# Allegro board BLDC_MOTOR_CONTROLLER.brd
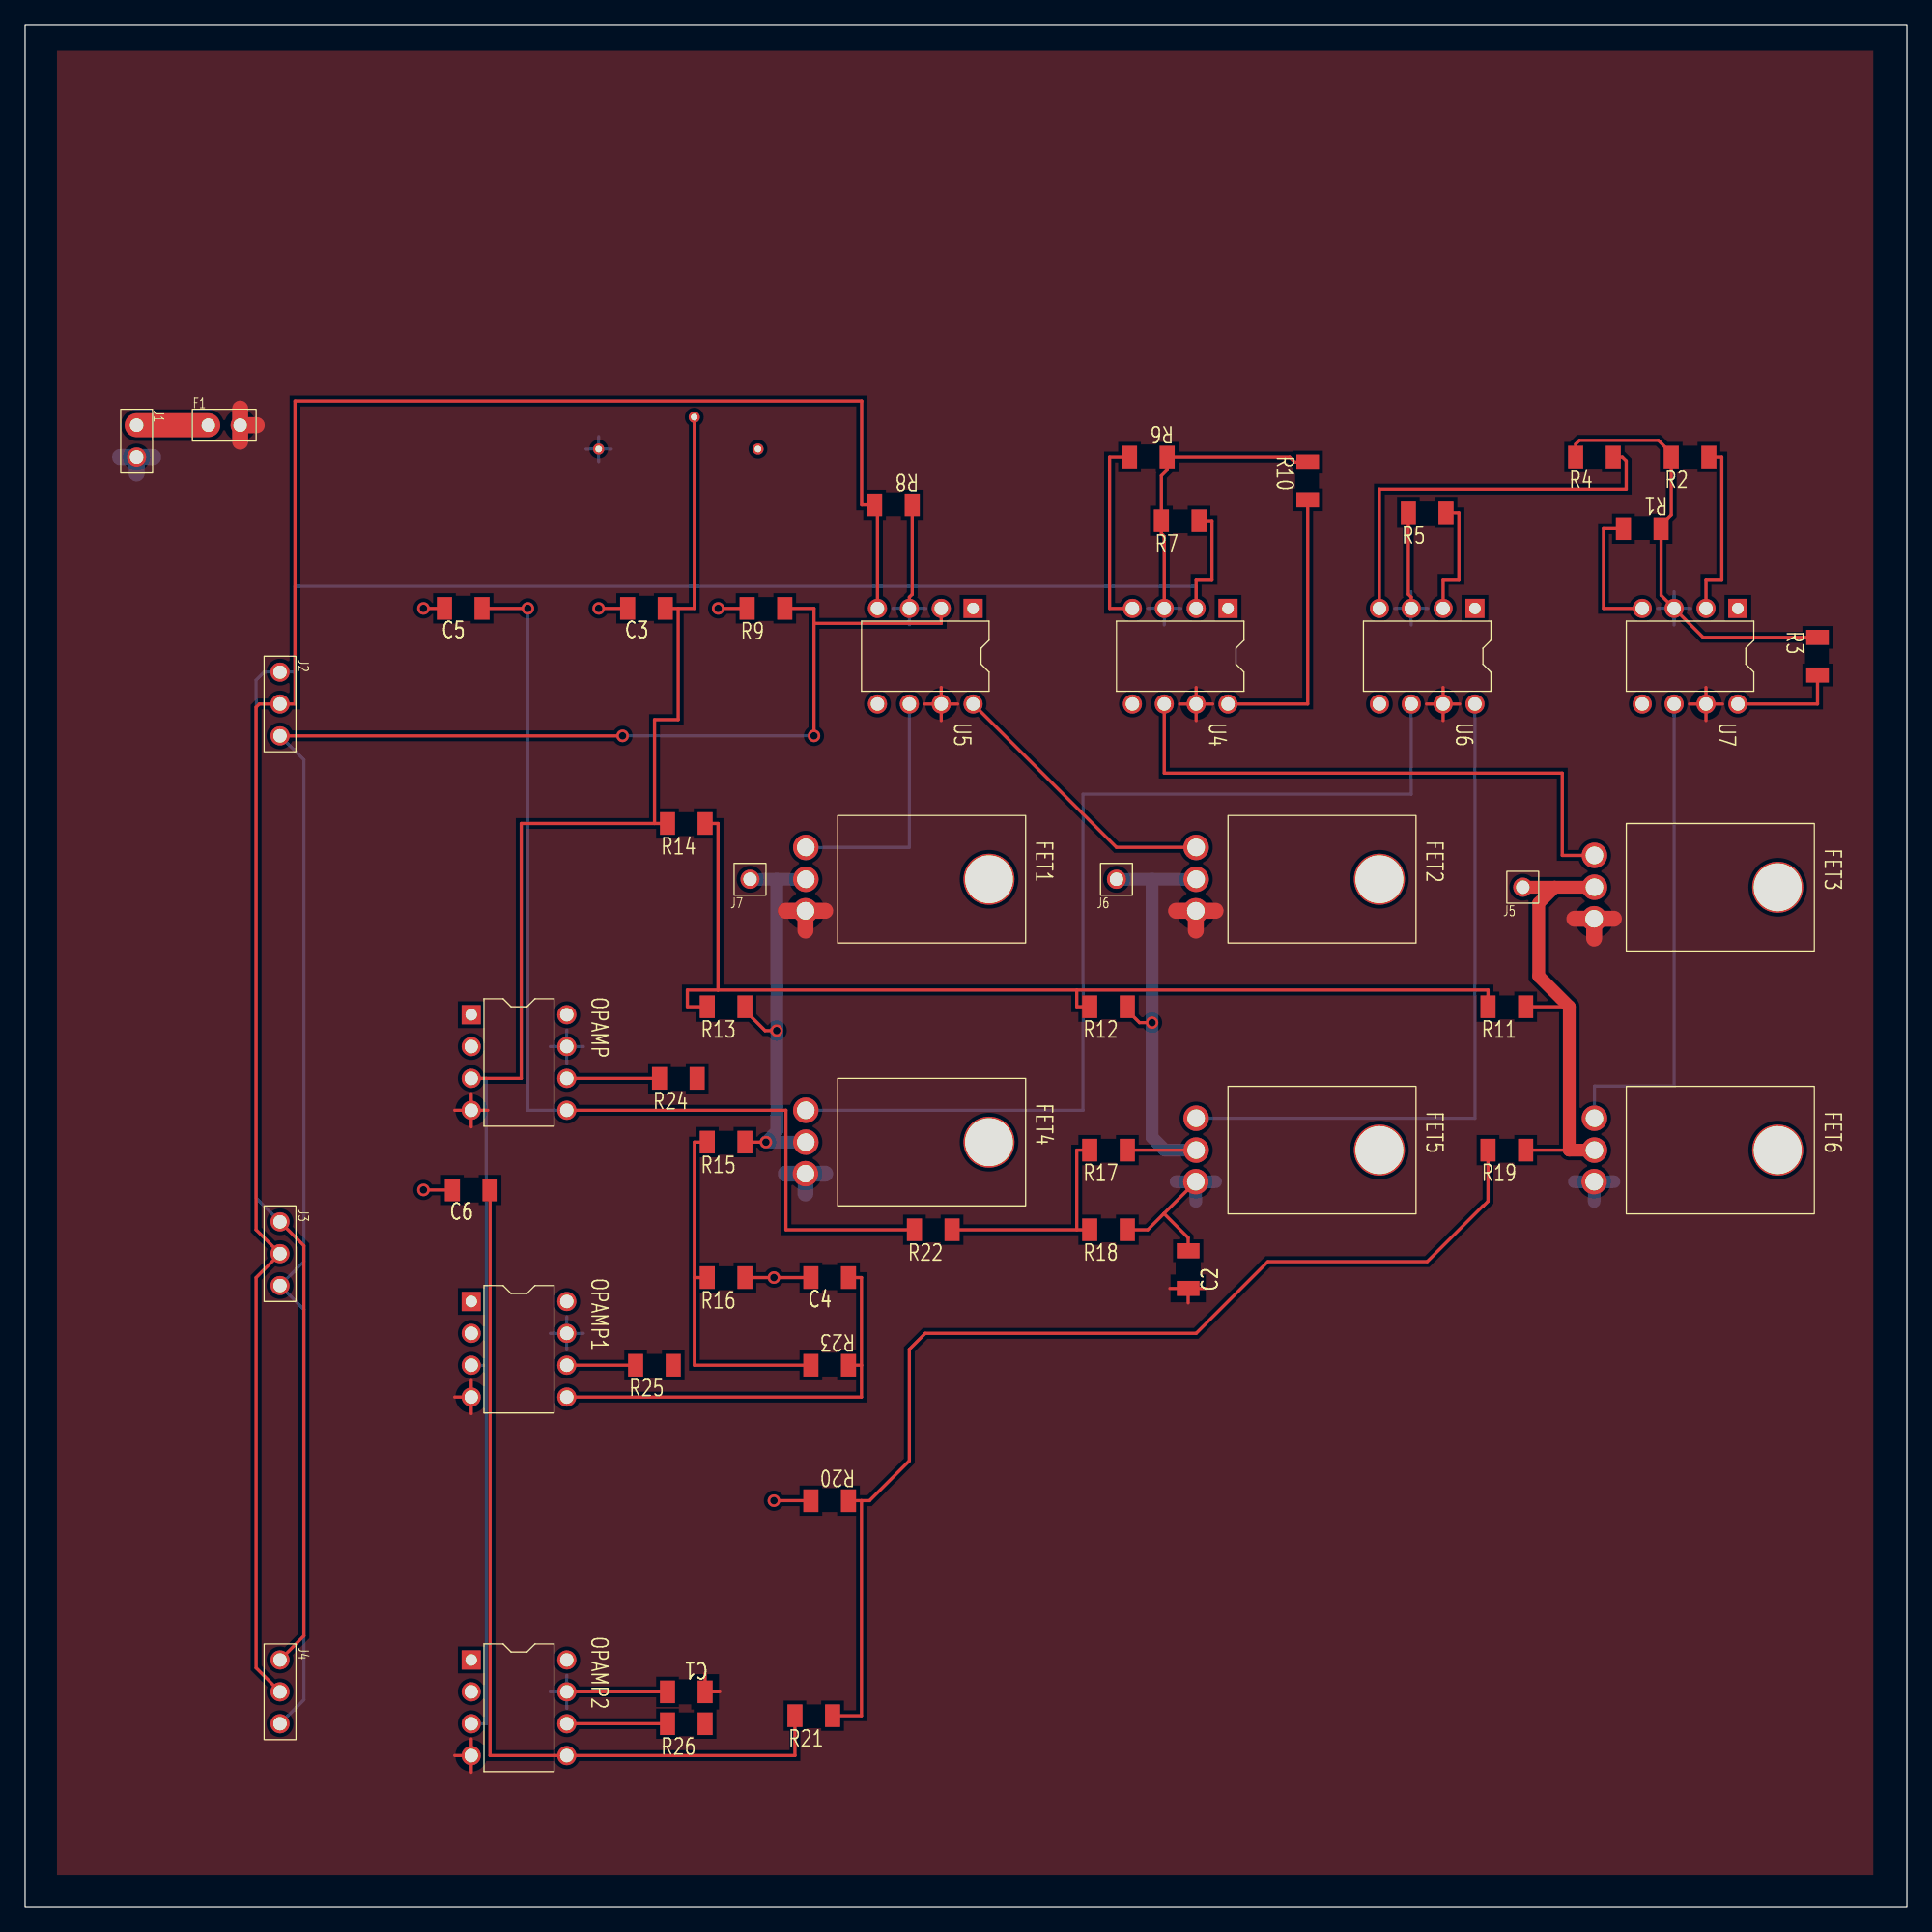
[diagram p0: board, top side]
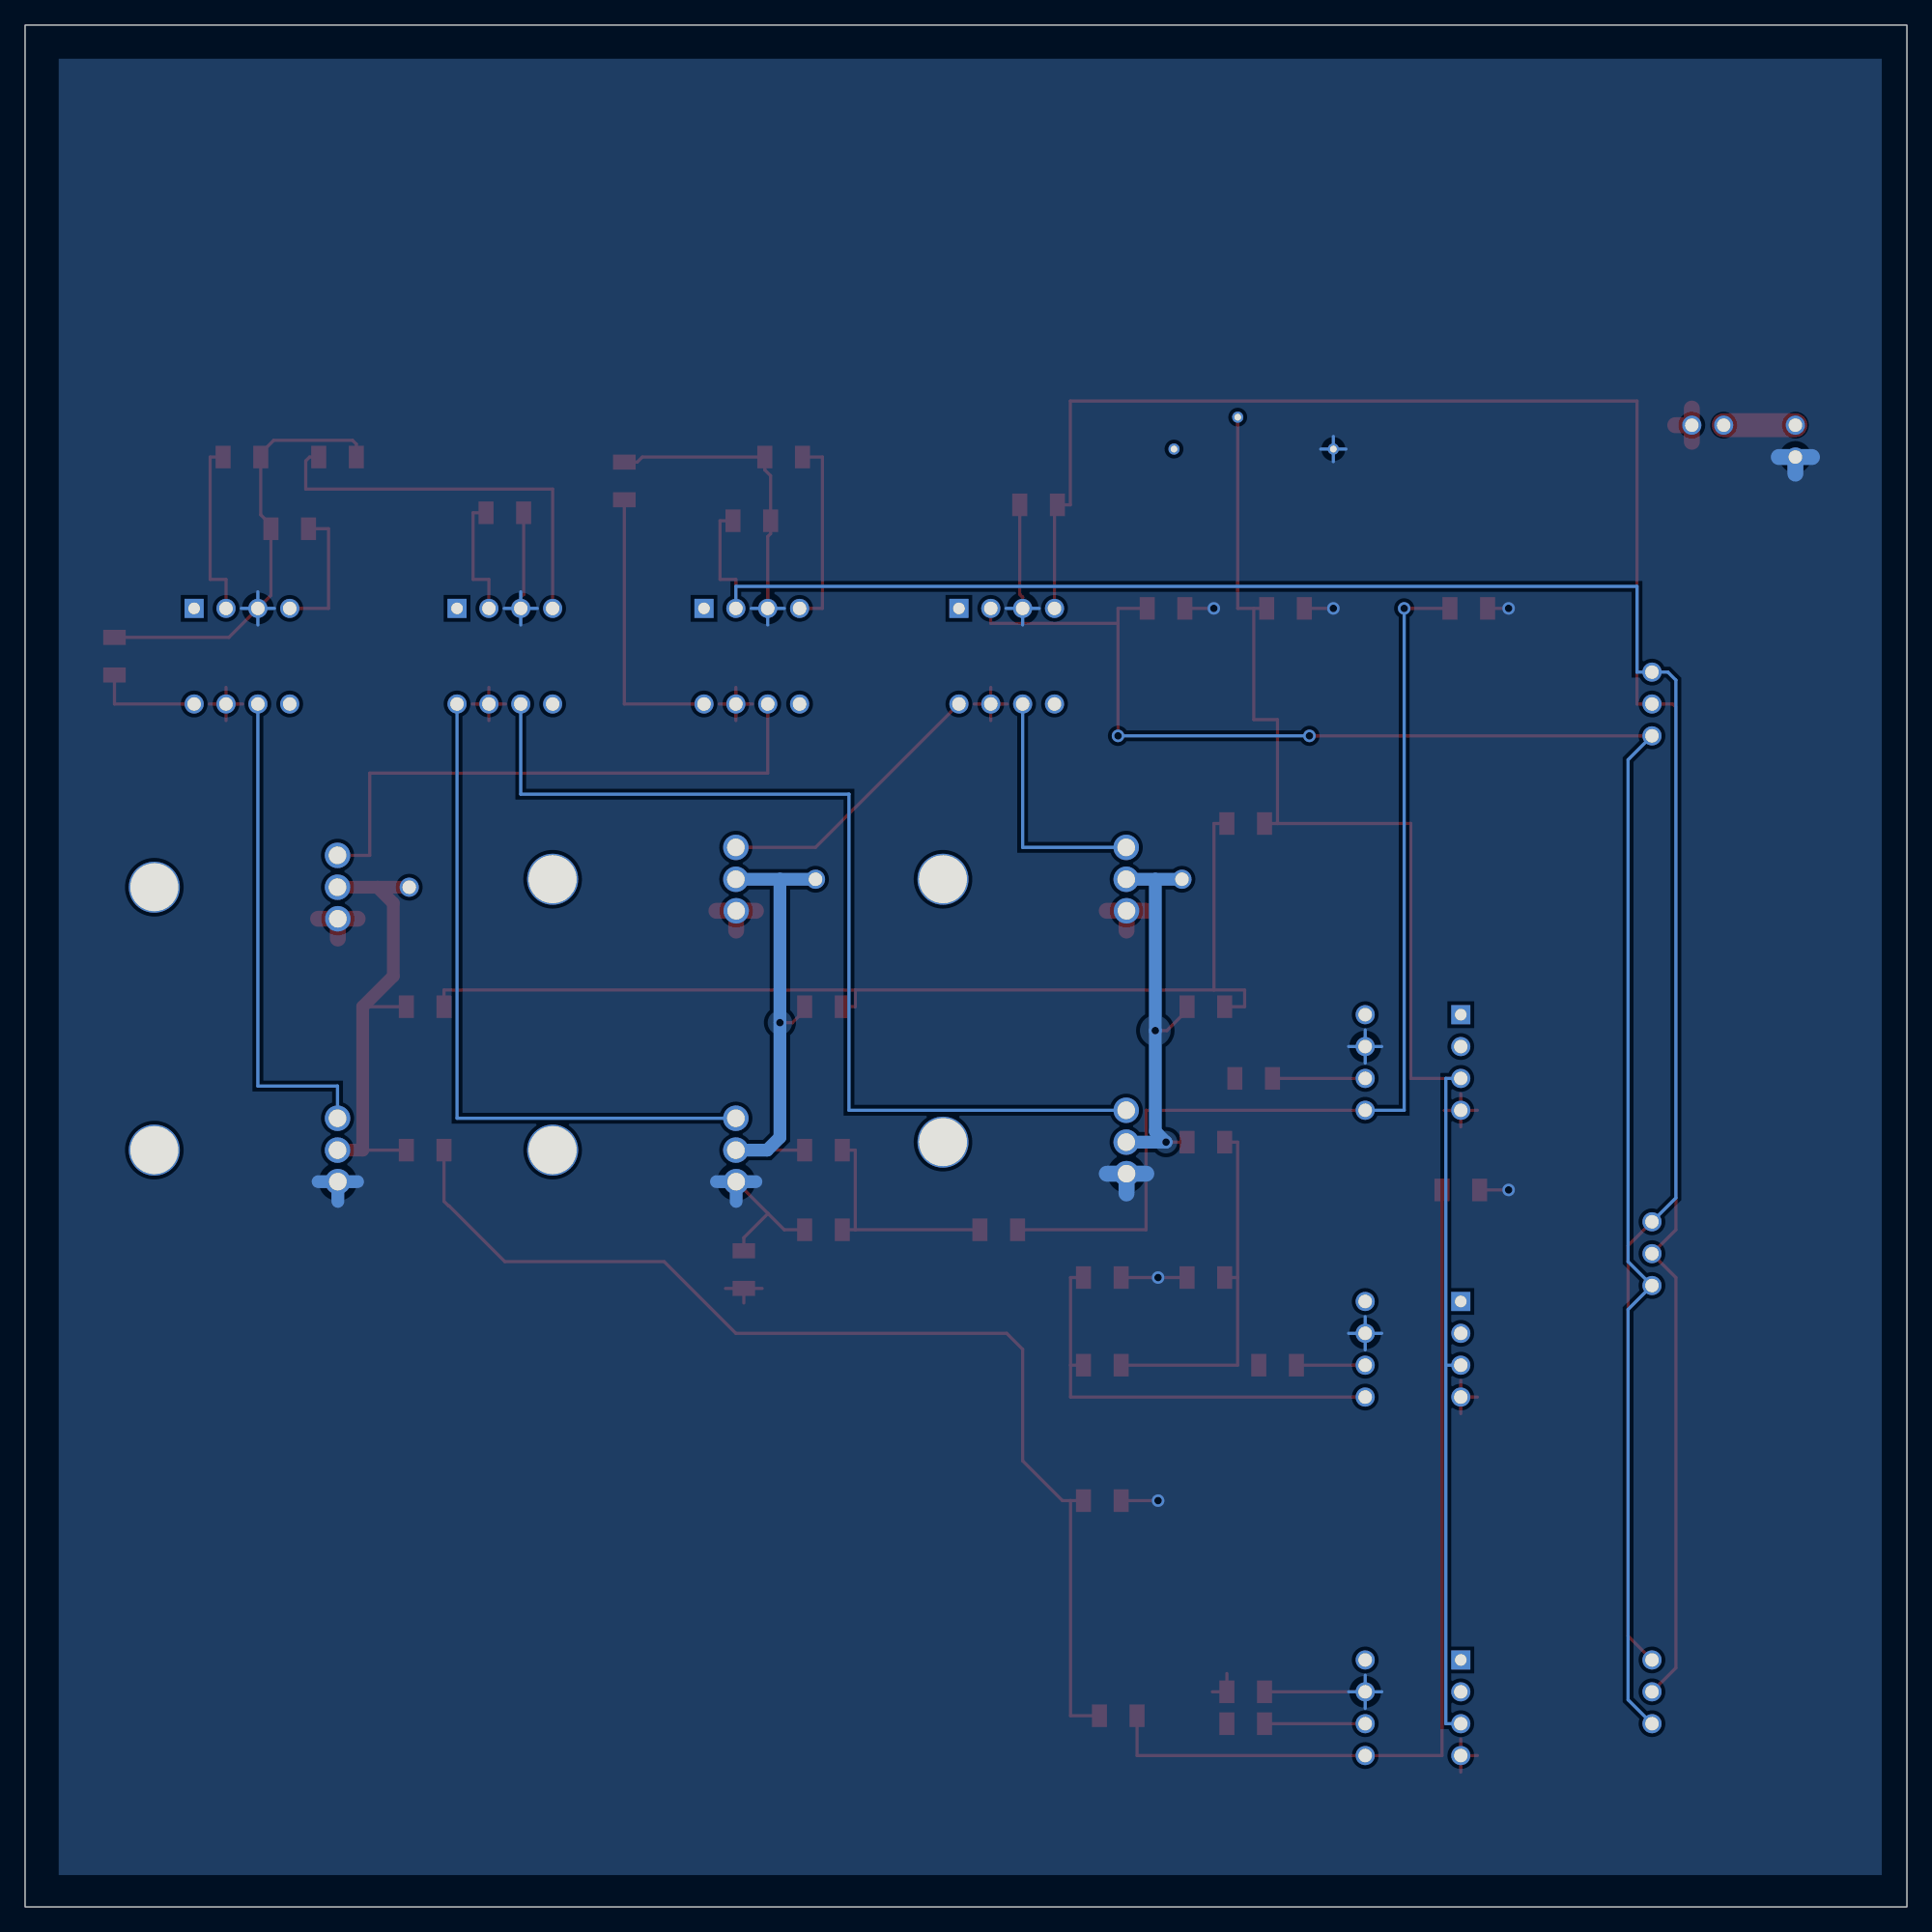
[diagram p1: board, bottom side, seen from below]

Outline 150 x 150 mm; copper layers: TOP, BOTTOM. Coordinates in mm from the lower left corner of the outline.
Outline path: rectangle 0,0 150,150

## Placement (name value [footprint] x y rotation side)
C1  1u  [SMD_CAP_1206]  52.7 17.14 180 top
C2  1u  [SMD_CAP_1206]  92.71 50.8 90 top
C3  .01u  [SMD_CAP_1206]  49.53 103.5 0 top
C4  .01u  [SMD_CAP_1206]  64.14 50.16 0 top
C5  .01u  [SMD_CAP_1206]  34.92 103.5 0 top
C6  .01u  [SMD_CAP_1206]  35.56 57.15 0 top
F1  FUSE  [JUMPER2]  14.61 118.11 0 top
FET1  MOSFETIXTP96P085T  [TO220H]  62.23 84.45 270 top
FET2  MOSFETIXTP96P085T  [TO220H]  93.34 84.45 270 top
FET3  MOSFETIXTP96P085T  [TO220H]  125.09 83.82 270 top
FET4  MOSFET-NTD4960N  [TO220H]  62.23 63.5 270 top
FET5  MOSFET-NTD4960N  [TO220H]  93.34 62.87 270 top
FET6  MOSFET-NTD4960N  [TO220H]  125.09 62.87 270 top
J1  HEADER 2  [JUMPER2]  8.89 118.11 270 top
J2  HEADER 3  [JUMPER3]  20.32 98.42 270 top
J3  HEADER 3  [JUMPER3]  20.32 54.61 270 top
J4  HEADER 3  [JUMPER3]  20.32 19.68 270 top
J5  HEADER 1  [JUMPER1]  119.38 81.28 0 top
J6  HEADER 1  [JUMPER1]  87 81.92 0 top
J7  HEADER 1  [JUMPER1]  57.78 81.92 0 top
OPAMP  HEADER 4x2/SM  [DIP8_3]  35.56 71.12 0 top
OPAMP1  HEADER 4x2/SM  [DIP8_3]  35.56 48.26 0 top
OPAMP2  HEADER 4x2/SM  [DIP8_3]  35.56 19.68 0 top
R1  470k  [SMD_RES_1206]  128.91 109.86 180 top
R2  200k  [SMD_RES_1206]  132.72 115.57 0 top
R3  10k  [SMD_RES_1206]  142.88 99.69 270 top
R4  200k  [SMD_RES_1206]  125.09 115.57 0 top
R5  200k  [SMD_RES_1206]  111.76 111.12 0 top
R6  470k  [SMD_RES_1206]  89.53 115.57 180 top
R7  200k  [SMD_RES_1206]  92.08 110.49 0 top
R8  200k  [SMD_RES_1206]  69.22 111.76 180 top
R9  200k  [SMD_RES_1206]  59.05 103.5 0 top
R10  20k  [SMD_RES_1206]  102.23 113.67 270 top
R11  1k  [SMD_RES_1206]  118.11 71.75 0 top
R12  1k  [SMD_RES_1206]  86.36 71.75 0 top
R13  1k  [SMD_RES_1206]  55.88 71.75 0 top
R14  10k  [SMD_RES_1206]  52.7 86.36 0 top
R15  10k  [SMD_RES_1206]  55.88 60.96 0 top
R16  1k  [SMD_RES_1206]  55.88 50.16 0 top
R17  10k  [SMD_RES_1206]  86.36 60.33 0 top
R18  1k  [SMD_RES_1206]  86.36 53.98 0 top
R19  10k  [SMD_RES_1206]  118.11 60.33 0 top
R20  1k  [SMD_RES_1206]  64.14 32.38 180 top
R21  470  [SMD_RES_1206]  62.87 15.24 0 top
R22  470  [SMD_RES_1206]  72.39 53.98 0 top
R23  470  [SMD_RES_1206]  64.14 43.18 180 top
R24  100  [SMD_RES_1206]  52.07 66.04 0 top
R25  100  [SMD_RES_1206]  50.16 43.18 0 top
R26  100  [SMD_RES_1206]  52.7 14.61 0 top
R27  POT  [POT_SIDE]  45.72 116.2 0 top
U4  IXDI  [DIP8_3]  95.89 103.5 270 top
U5  IXDI  [DIP8_3]  75.56 103.5 270 top
U6  IXDI  [DIP8_3]  115.57 103.5 270 top
U7  IXDI  [DIP8_3]  136.53 103.5 270 top

## Library data of the parts
C1-C6 = C
F1 = FUSE: User Part Number: ***
FET1-FET3 = MOSFETIXTP96P085T_0
FET4-FET6 = MOSFET-NTD4960N
J1 = HEADER 2: User Part Number: ***
J2-J4 = HEADER 3: User Part Number: ***
J5-J7 = HEADER 1: User Part Number: ***
OPAMP OPAMP1 OPAMP2 = HEADER 4x2/SM: Tolerance: ***; User Part Number: ***
R1-R26 = R
R27 = POT
U4-U7 = IDXI604PI_0: Tolerance: ***; User Part Number: ***

## Footprints (pads in the part's own frame, mm; a bottom-side part is the same pattern mirrored in y, then rotated)
DIP8_3
  rect 1.524x1.524 hole 0.914: 1(0,0)
  round 1.524 hole 1.067: 2(0,-2.54) 3(0,-5.08) 4(0,-7.62) 5(7.62,-7.62) 6(7.62,-5.08) 7(7.62,-2.54) 8(7.62,0)
JUMPER1
  round 1.524 hole 1.067: 1(0,0)
JUMPER2
  round 1.524 hole 1.067: 1(0,0) 2(2.54,0)
JUMPER3
  round 1.524 hole 1.067: 1(0,0) 2(2.54,0) 3(5.08,0)
POT_SIDE
  round 0.889 hole 0.533: 1(0,0) 2(7.62,2.54) 3(12.7,0)
SMD_CAP_1206
  rect 1.2x1.8 smd: 1(-1.5,0) 2(1.5,0)
SMD_RES_1206
  rect 1.2x1.8 smd: 1(-1.5,0) 2(1.5,0)
TO220H
  round 4.064 hole 3.81: (2.54,14.605)
  round 2.032 hole 1.397: 1(0,0) 2(2.54,0) 3(5.055,-0.025)

## Nets
VCC_BAR: C1.1 C2.1 F1.2 FET1.3(S) FET2.3(S) FET3.3(S) OPAMP.4 OPAMP1.4 OPAMP2.4 U4.7(VCC) U5.7(VCC) U6.7(VCC) U7.7(VCC)
0: C1.2 C2.2 C3.1 C4.1 C5.1 C6.1 FET4.3(S) FET5.3(S) FET6.3(S) J1.2 OPAMP.7 OPAMP1.7 OPAMP2.7 R1.1 R2.1 R3.1 R4.1 R5.1 R6.1 R7.1 R8.1 R9.1 R10.1 R16.2 R18.2 R20.2 R27.1(A) U4.3(GND) U5.3(GND) U6.3(GND) U7.3(GND)
OPAMPS 0: FET1.2(D) FET4.2(D) J7.1 R13.2 R15.2
OPAMPS 1: FET2.2(D) FET5.2(D) J6.1 R12.2 R17.2
OPAMPS 2: FET3.2(D) FET6.2(D) J5.1 R11.2 R19.2
PORT 0 - 3: J2.1 J3.1 J4.1 R7.2 U4.2(INA)
PORT 0 - 4: J2.2 J3.2 J4.2 R8.2 U5.4(INB)
PORT 0 - 5: J2.3 J3.3 J4.3 R9.2 U5.2(INA)
PORT 1 - 3: R26.2
PORT 1 - 4: R24.2
PORT 1 - 5: R25.2
PORT 2 - 3: R2.2 U7.2(INA)
PORT 2 - 4: R4.2 U6.4(INB)
PORT 2 - 5: R5.2 U6.2(INA)
N00423: R1.2 U7.4(INB)
N00623: FET6.1(G) U7.6(~OUTA)
N01310: FET4.1(G) U6.6(~OUTA)
N03265: R6.2 U4.4(INB)
N04569: R10.2 U4.8(~OUTB)
N04830: FET3.1(G) U4.6(~OUTA)
N04838: FET2.1(G) U5.8(~OUTB)
N06155: R11.1 R12.1 R13.1 R14.2
N06272: C3.2 OPAMP.3 OPAMP1.3 OPAMP2.3 R14.1 R27.2(WIPER)
N06625: R15.1 R16.1 R23.2
N06799: R17.1 R18.1 R22.2
N06887: R19.1 R20.1 R21.2
N07302: C6.2 OPAMP2.5 R21.1
N07354: C5.2 OPAMP.5 R22.1
N07358: C4.2 OPAMP1.5 R23.1
N07890: OPAMP.6 R24.1
N07989: OPAMP1.6 R25.1
N08051: OPAMP2.6 R26.1
N17870: FET1.1(G) U5.6(~OUTA)
N23837: FET5.1(G) U6.8(~OUTB)
N30323: R3.2 U7.8(~OUTB)
N43497: F1.1 J1.1

Pads without a net: OPAMP 1 2 8; OPAMP1 1 2 8; OPAMP2 1 2 8; R27 3; U4 1 5; U5 1 5; U6 1 5; U7 1 5

## Via types
v1: diameter 1, hole 0.6, TOP to BOTTOM, 12 vias

## Routing (per net, layer and track width the routed paths; a pad name or vN(x,y) marks a point on that pad's centre or on a via; arc(x,y) is an arc through that point)
VCC_BAR: length 59.2
  TOP w0.254: U7.7 133.99,97.21 ; U7.7 135.31,95.89 ; U7.7 133.99,94.56 ; U7.7 132.66,95.89 ; U6.7 113.03,97.21 ; U6.7 111.71,95.89 ; U6.7 113.03,94.56 ; U6.7 114.35,95.89 ; 35.56,62.18 OPAMP.4 ; OPAMP.4 36.88,63.5 ; OPAMP.4 35.56,64.82 ; OPAMP.4 34.24,63.5 ; 54.2,18.6 C1.1 55.36,17.14 ; U4.7 93.34,97.21 ; U4.7 94.67,95.89 ; U4.7 92.02,95.89 ; U4.7 93.34,94.56 ; U5.7 73.03,97.21 ; U5.7 73.03,94.56 ; U5.7 71.7,95.89 ; U5.7 74.35,95.89 ; OPAMP2.4 35.56,13.39 ; OPAMP2.4 35.56,10.74 ; OPAMP2.4 34.24,12.06 ; OPAMP1.4 35.56,41.96 ; OPAMP1.4 34.24,40.64 ; OPAMP1.4 35.56,39.32 ; C2.1 94.17,49.3 ; C2.1 92.71,48.14 ; C2.1 91.25,49.3
  TOP w1.27: 93.32,77.83 FET2.3 ; FET2.3 94.89,79.4 ; FET2.3 91.74,79.4 ; F1.2 18.47,118.11 ; F1.2 17.14,116.79 ; F1.2 17.14,119.43 ; 125.07,77.19 FET3.3 ; FET3.3 126.64,78.77 ; FET3.3 123.49,78.77 ; FET1.3 63.78,79.4 ; FET1.3 60.63,79.4 ; FET1.3 62.2,77.83
0: length 166.6
  TOP w0.254: R10.1 101.21,115.16 100.8,115.57 R6.1 91.03,114.54 90.58,114.08 R7.1 90.58,109.46 90.81,109.23 U4.3 ; R9.1 v1(55.24,103.5) ; R3.1 133.76,101.19 U7.3 130.4,104.55 R1.1 130.4,110.16 131.22,110.97 R2.1 131.22,115.87 130.18,116.9 123.9,116.9 123.6,116.6 R4.1 ; R16.2 v1(59.69,50.16) C4.1 ; R20.2 v1(59.69,32.38) ; R5.1 110.26,104.62 110.49,104.39 U6.3 ; R18.2 89.48,53.98 90.78,55.27 ; 90.78,55.27 FET5.3 ; 90.78,55.27 92.71,53.34 C2.2 ; OPAMP2.7 C1.2 ; R8.1 70.71,104.62 70.48,104.39 U5.3 ; C5.1 v1(31.75,103.5) ; C6.1 v1(31.75,57.15) ; C3.1 v1(45.72,103.5)
  BOTTOM w0.254: 89.48,103.5 U4.3 ; U4.3 90.81,102.18 ; U4.3 92.13,103.5 ; U6.3 111.81,103.5 ; U6.3 109.17,103.5 ; U6.3 110.49,104.83 ; U6.3 110.49,102.18 ; 43.18,15.82 OPAMP2.7 ; OPAMP2.7 43.18,18.47 ; OPAMP2.7 44.5,17.14 ; OPAMP2.7 41.86,17.14 ; 41.86,45.72 OPAMP1.7 ; OPAMP1.7 44.5,45.72 ; OPAMP1.7 43.18,47.04 ; OPAMP1.7 43.18,44.4 ; 69.16,103.5 U5.3 ; U5.3 70.48,102.18 ; U5.3 71.81,103.5 ; U7.3 131.44,104.83 ; U7.3 131.44,102.18 ; U7.3 132.77,103.5 ; U7.3 130.12,103.5 ; 41.86,68.58 OPAMP.7 ; OPAMP.7 43.18,69.9 ; OPAMP.7 43.18,67.26 ; OPAMP.7 44.5,68.58 ; 45.72,115.2 R27.1 ; R27.1 46.72,116.2 ; R27.1 45.72,117.21 ; R27.1 44.72,116.2
  BOTTOM w1.016: 123.49,57.81 FET6.3 ; FET6.3 125.07,56.24 ; FET6.3 126.64,57.81 ; 93.32,56.24 FET5.3 ; FET5.3 94.89,57.81 ; FET5.3 91.74,57.81
  BOTTOM w1.27: 60.63,58.45 FET4.3 ; FET4.3 63.78,58.45 ; FET4.3 62.2,56.87 ; J1.2 10.21,115.57 ; J1.2 7.57,115.57 ; J1.2 8.89,114.25
OPAMPS 0: length 34.1
  TOP w0.254: R13.2 57.38,71.45 58.98,69.85 v1(59.91,69.85) ; R15.2 v1(59.05,60.96)
  BOTTOM w1.016: J7.1 59.91,81.92 ; 59.91,81.92 62.23,81.92 ; 59.91,81.92 v1(59.91,69.85) 59.91,61.82 v1(59.05,60.96) FET4.2
OPAMPS 1: length 39
  TOP w0.254: R12.2 87.86,71.45 88.83,70.48 v1(89.83,70.48) ; R17.2 FET5.2
  BOTTOM w1.016: 89.83,81.92 93.34,81.92 ; 89.83,81.92 J6.1 ; 89.83,81.92 v1(89.83,70.48) 89.83,61.34 90.85,60.33 FET5.2
OPAMPS 2: length 37.2
  TOP w0.254: 123.09,60.33 R19.2 ; 123.09,71.75 R11.2
  TOP w1.016: 121.92,81.28 120.65,80.01 120.65,74.19 123.09,71.75 123.09,60.33 FET6.2 ; 121.92,81.28 J5.1 ; 121.92,81.28 FET3.2
PORT 0 - 3: length 173.5
  TOP w0.254: R7.2 94.61,110.49 94.61,105.82 93.34,105.82 U4.2 ; J4.1 22.23,21.59 22.23,52.7 J3.1
  BOTTOM w0.254: U4.2 93.34,105.26 21.51,105.26 21.51,98.42 J2.1 19.05,98.42 18.41,97.79 18.41,56.52 J3.1
PORT 0 - 4: length 171.2
  TOP w0.254: U5.4 67.94,111.76 R8.2 66.68,111.76 66.68,120.04 21.51,120.04 21.51,95.89 J2.2 18.67,95.89 18.41,95.63 18.41,53.98 J3.2 18.41,50.16 18.41,19.05 J4.2
PORT 0 - 5: length 148.3
  TOP w0.254: v1(62.88,93.34) 62.88,102.31 ; 62.88,102.31 73.03,102.31 U5.2 ; 62.88,102.31 62.88,103.5 R9.2 ; v1(47.62,93.34) J2.3
  BOTTOM w0.254: J2.3 22.23,91.44 22.23,51.44 J3.3 22.23,47.62 22.23,16.51 J4.3 ; v1(47.62,93.34) v1(62.88,93.34)
PORT 2 - 3: length 14.4
  TOP w0.254: U7.2 133.99,105.82 135.25,105.82 135.25,115.57 R2.2
PORT 2 - 4: length 32.6
  TOP w0.254: U6.4 107.95,113.02 127.63,113.02 127.63,115.27 127.32,115.57 R4.2
PORT 2 - 5: length 9.9
  TOP w0.254: R5.2 114.29,111.12 114.29,105.82 113.03,105.82 U6.2
N00423: length 11
  TOP w0.254: U7.4 125.81,103.5 125.81,109.86 R1.2
N00623: length 39.4
  BOTTOM w0.254: U7.6 131.44,65.43 125.09,65.43 FET6.1
N01310: length 80.6
  BOTTOM w0.254: U6.6 110.49,88.7 84.33,88.7 84.33,63.5 FET4.1
N03265: length 15.5
  TOP w0.254: U4.4 86.44,103.5 86.44,115.57 R6.2
N04569: length 22.6
  TOP w0.254: U4.8 102.23,95.89 R10.2
N04830: length 46.4
  TOP w0.254: U4.6 90.81,90.37 122.53,90.37 122.53,83.82 FET3.1
N04838: length 22.5
  TOP w0.254: FET2.1 87,84.45 U5.8
N06155: length 84.7
  TOP w0.254: 55.24,73.09 52.79,73.09 52.79,71.75 R13.1 ; 55.24,73.09 55.24,86.36 R14.2 ; 55.24,73.09 83.83,73.09 ; R12.1 83.83,71.75 83.83,73.09 ; 83.83,73.09 116.61,73.09 R11.1
N06272: length 127.6
  TOP w0.254: R14.1 50.17,86.36 ; 50.17,86.36 39.55,86.36 39.55,66.04 OPAMP.3 ; 50.17,86.36 50.17,94.64 52.06,94.64 52.06,103.5 ; C3.2 52.06,103.5 ; 52.06,103.5 53.34,103.5 R27.2
  BOTTOM w0.254: OPAMP2.3 36.75,14.61 36.75,43.18 ; OPAMP1.3 36.75,43.18 ; 36.75,43.18 36.75,66.04 OPAMP.3
N06625: length 29.1
  TOP w0.254: R16.1 53.35,50.16 ; 53.35,50.16 53.35,43.18 R23.2 ; 53.35,50.16 53.35,60.96 R15.1
N06799: length 18.4
  TOP w0.254: R17.1 83.83,60.33 83.83,53.98 ; 83.83,53.98 R22.2 ; 83.83,53.98 R18.1
N06887: length 89.6
  TOP w0.254: R20.1 66.67,32.38 ; 66.67,32.38 66.67,15.24 R21.2 ; 66.67,32.38 67.31,32.38 70.48,35.56 70.48,44.45 71.75,45.72 93.34,45.72 99.06,51.44 111.76,51.44 116.2,55.88 116.25,55.88 116.61,56.24 R19.1
N07302: length 72.6
  TOP w0.254: C6.2 37.06,12.06 OPAMP2.5 61.37,12.06 R21.1
N07354: length 84
  TOP w0.254: R22.1 60.65,53.98 60.65,63.5 OPAMP.5 ; C5.2 v1(40.07,103.5)
  BOTTOM w0.254: OPAMP.5 40.07,63.5 v1(40.07,103.5)
N07358: length 35.1
  TOP w0.254: C4.2 66.67,50.16 66.67,43.18 ; OPAMP1.5 66.67,40.64 66.67,43.18 ; 66.67,43.18 R23.1
N07890: length 7.4
  TOP w0.254: R24.1 OPAMP.6
N07989: length 5.5
  TOP w0.254: R25.1 OPAMP1.6
N08051: length 8
  TOP w0.254: R26.1 OPAMP2.6
N17870: length 19.7
  BOTTOM w0.254: U5.6 70.48,84.45 FET1.1
N23837: length 55.2
  BOTTOM w0.254: U6.8 115.57,62.87 FET5.1
N30323: length 8.7
  TOP w0.254: R3.2 142.88,95.89 U7.8
N43497: length 5.7
  TOP w1.905: F1.1 J1.1

## Copper pours and planes (outline as drawn; the poured copper is in the pictures)
VCC_BAR on TOP: 147.32,147.96 147.32,2.54 2.54,2.54 2.54,147.96
0 on BOTTOM: 2,2.54 2,147.32 147.32,147.32 147.32,2.54
OPAMPS 0 on BOTTOM: 58.16,60.96 59.95,60.96
OPAMPS 0 on BOTTOM: 58.68,69.85 61.14,69.85
OPAMPS 1 on BOTTOM: 88.86,70.48 90.81,70.48
